# Altium PCB MAX232.PcbDoc
Units mil, origin at the board's own origin, x right, y up, seen from the top; angles counter-clockwise.
Board outline 6000 x 4000 mil, 2 copper layers (Top Layer, Bottom Layer); 7 components, 12 nets, 39 pads, 0 vias.
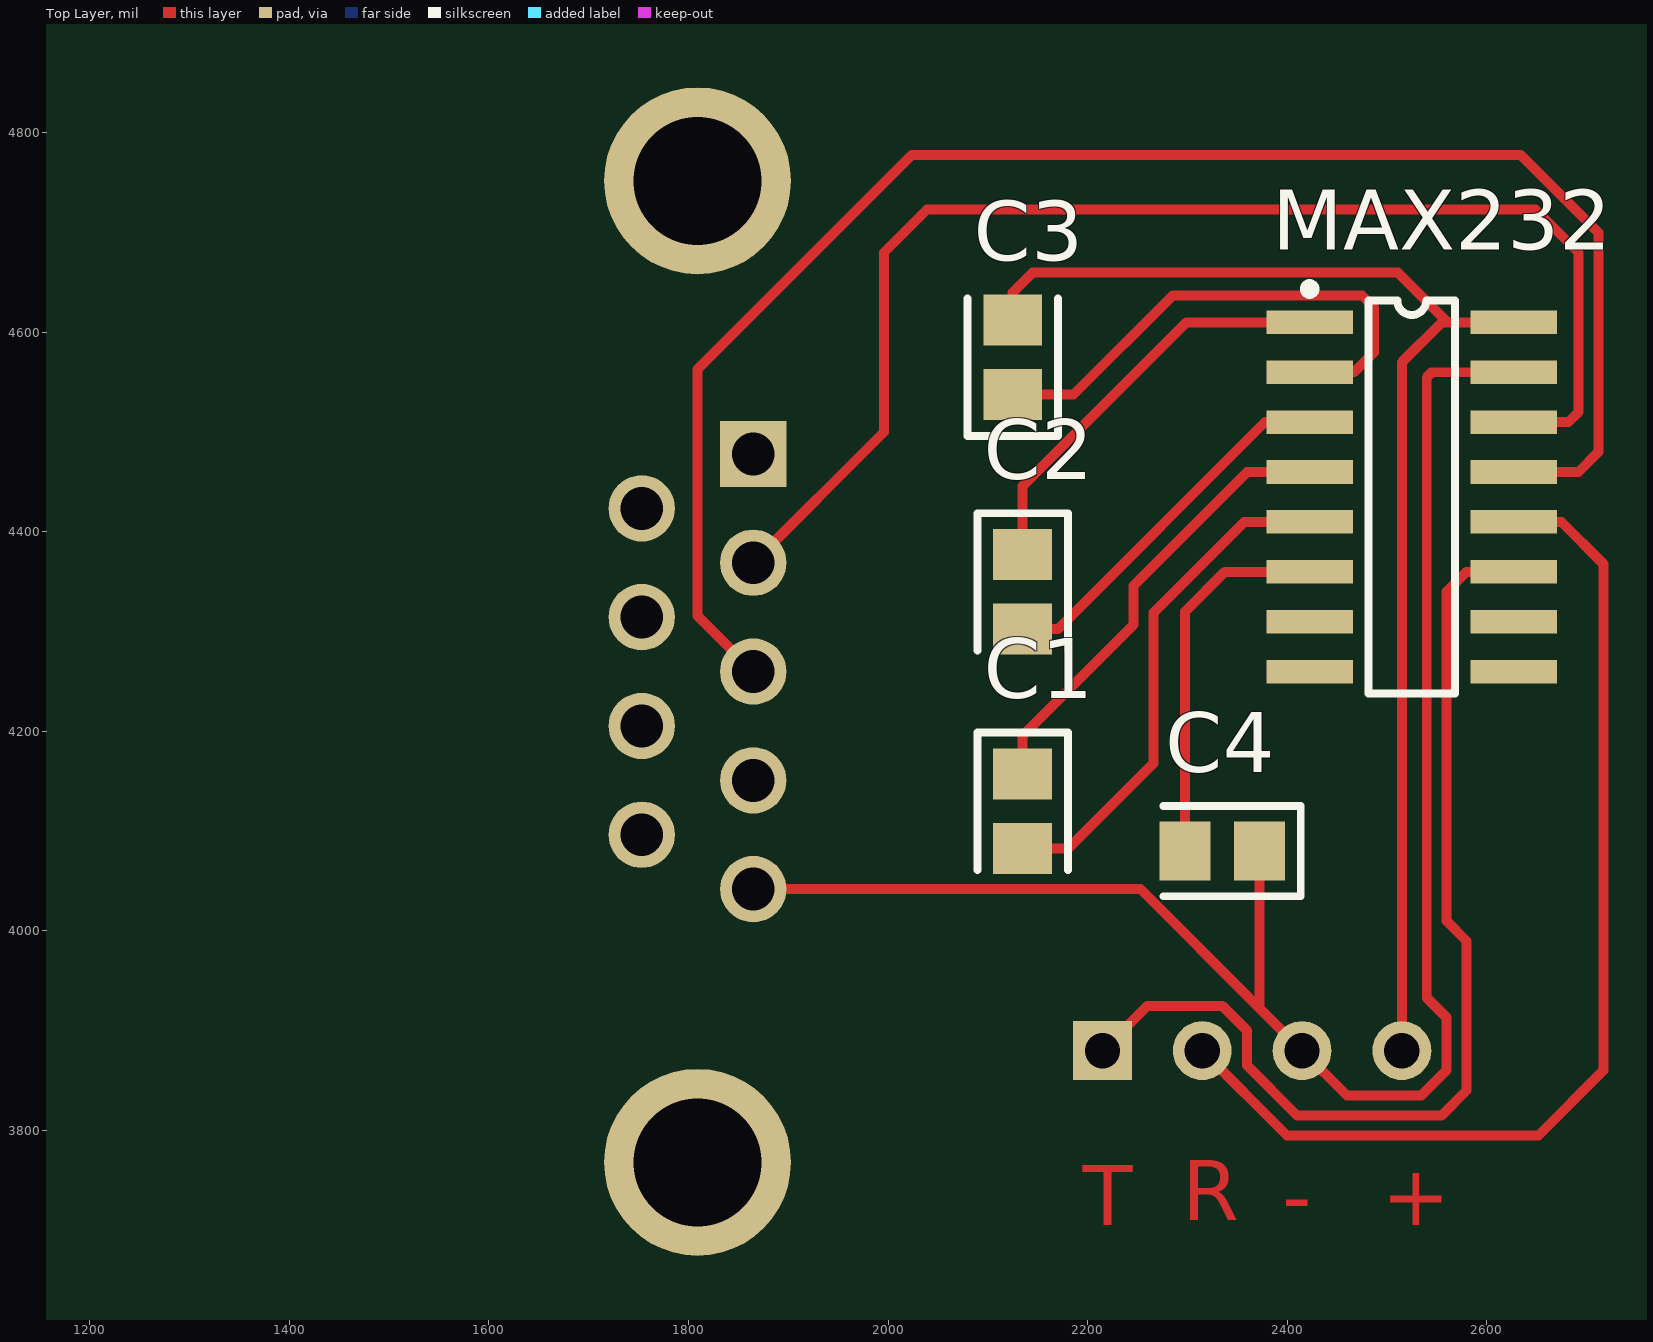
[diagram p0: Top Layer view]
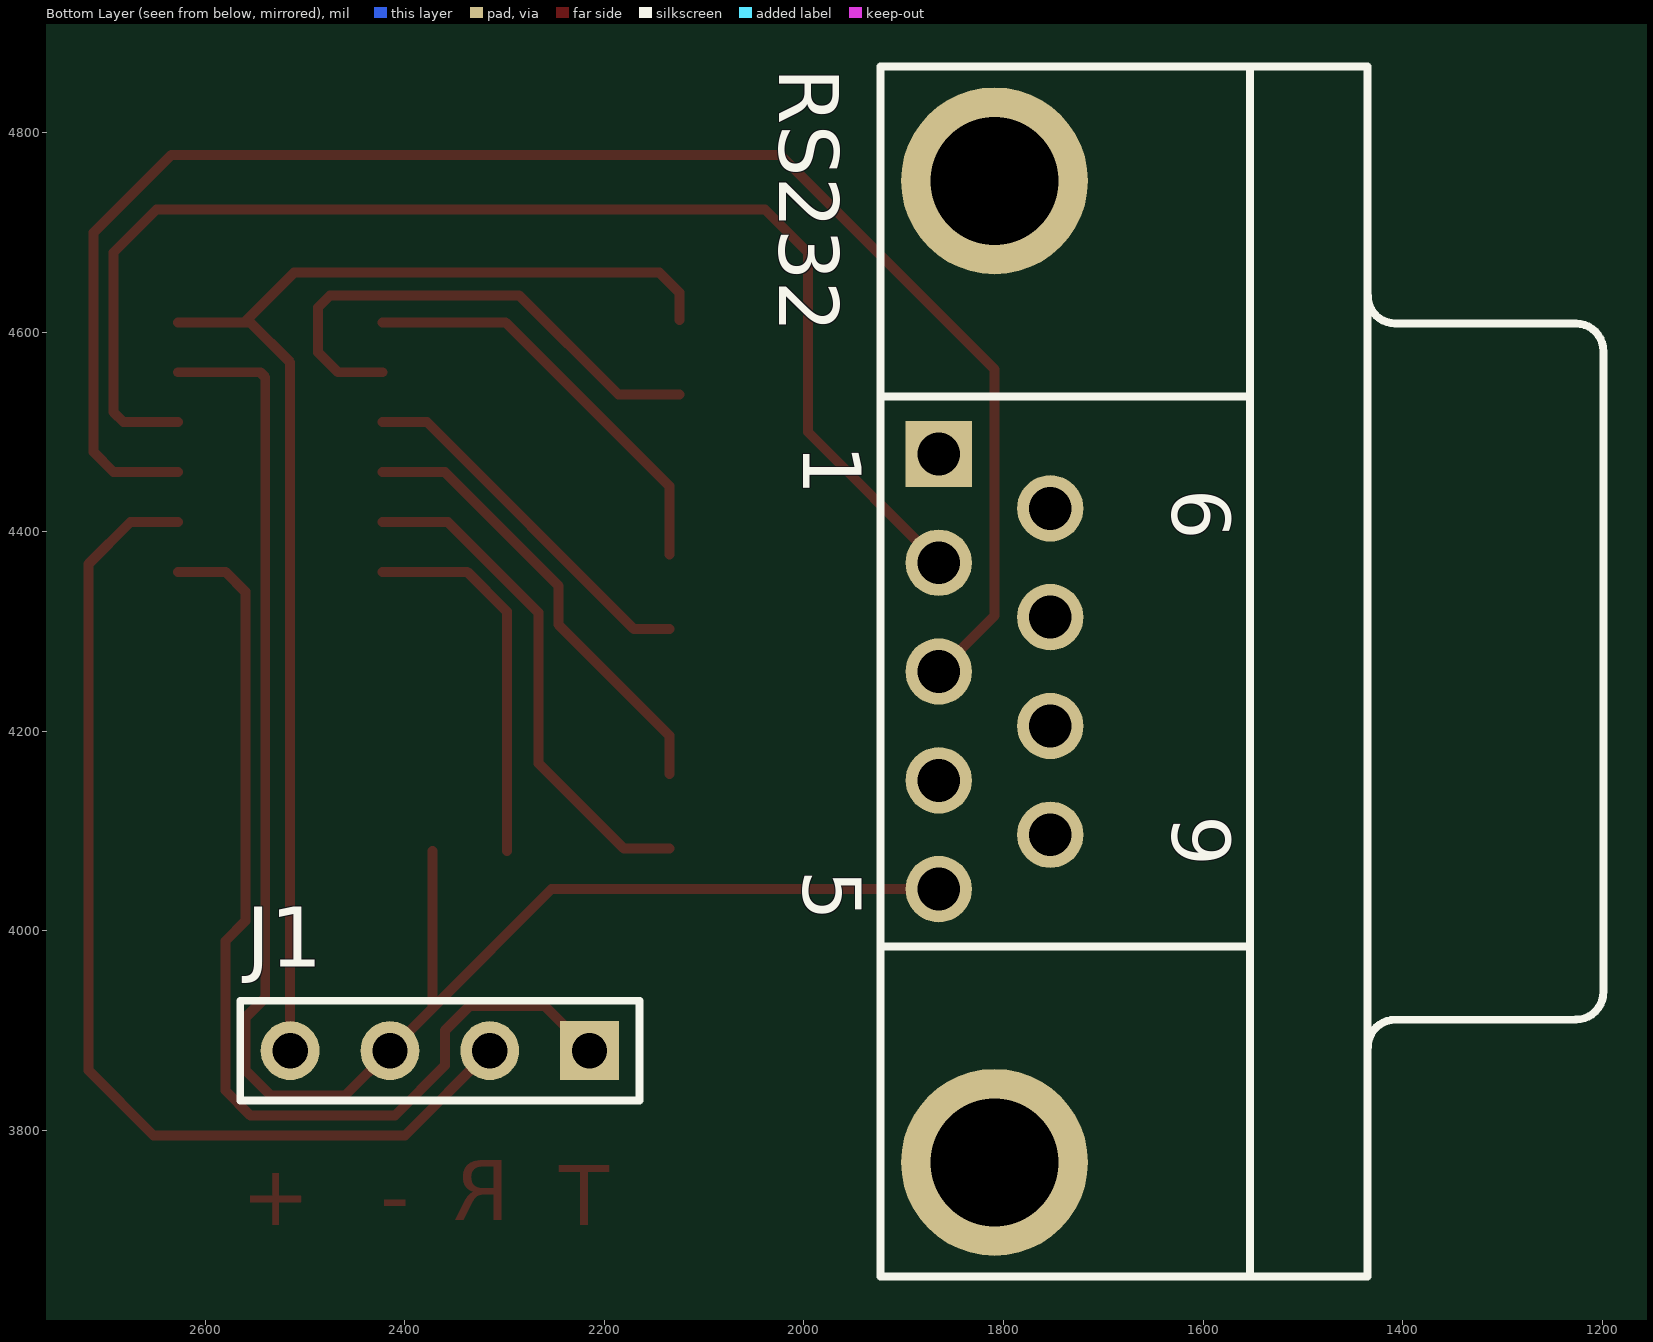
[diagram p1: Bottom Layer view, seen from below]

## Layer stack, top to bottom
Top Layer: signal copper 1.4
Dielectric: dielectric 12.6, FR-4, Dk 4.8
Bottom Layer: signal copper 1.4

## Board outline
1000,1000 7000,1000 7000,5000 1000,5000

## Design rules (kind name [scope] priority, off if disabled: settings)
Clearance [All] p1: gap=10
ComponentClearance [All] p1: gap=10 collisioncheckmode=0
PolygonConnect [All] p1: connectstyle=Relief reliefconductorwidth=10 reliefentries=4 polygonreliefangle="90 Angle"
RoomDefinition MAX232 [InComponentClass('MAX232')] p1: confinementstyle=ConfineIn formatcopy=TRUE outline 1185,3615 2760,3615 2760,4890 1185,4890
RoutingLayers [All] p1: top layer=Horizontal bottom layer=Vertical
RoutingVias [All] p1: holewidth=28 width=50 viastyle="Through Hole" minholewidth=28 minwidth=50 maxholewidth=28 maxwidth=50
SolderMaskExpansion [All] p1: expansion=4
TestPointUsage [All] p1: valid=0 allowmultiple=FALSE
Testpoint [All] p1: side=15 testpointundercomponent=TRUE minsize=40 maxsize=100 preferedsize=60 minholesize=0 maxholesize=40 preferedholesize=32 testpointgrid=1 style=1023 order=-539222988
Width [All] p1: maxlimit=15 minlimit=10 preferedwidth=10 minimp=50.000000 maximp=50.000000 favimp=50.000000
16 further rules are at their usual default settings.

## Components (designator, comment, footprint, x,y, rotation, side; value= is the part's Value field where it differs from the comment)
C1 "Cap Pol3" CC2012-0805 2135,4120 r270 top
C2 "Cap Pol3" CC2012-0805 2135,4340 r270 top
C3 "Cap Pol3" CC2012-0805 2125,4575 r90 top
C4 "Cap Pol3" CC2012-0805 2335,4080 r180 top
J1 "Header 4" HDR1X4 2215,3880 r0 bottom
MAX232 "MAX232CSE" NSO16 2525,4435 r270 top
RS232 "D Connector 9" DSUB1.385-2H9 1435,4260 r270 bottom (schematic designator "RS232 Interface")

## Footprints (in the part's own frame and the unit in brackets; to place one, negate y for a bottom-side part, rotate by r counter-clockwise, add the part's x,y. Pads: shape width x height; smd on the part's side, far side on the other; paste and mask are expansions set on the pad)
CC2012-0805 [mm]
  rect 1.3x1.5 smd: 1(-0.95,0) 2(0.95,0)
  silkscreen extent -2,-1.15 1.5,1.15
DSUB1.385-2H9 [mm] "Connector; D Subminiature; 9 Position; Right Angle; Pitch 1.385 mm"
  rect 1.69x1.69 hole 1.09: 1(-5.54,-10.92)
  round 1.69 hole 1.09: 2(-2.77,-10.92) 3(0,-10.92) 4(2.77,-10.92) 5(5.54,-10.92) 6(-4.155,-8.08) 7(-1.385,-8.08) 8(1.385,-8.08) 9(4.155,-8.08)
  round 4.76 hole 3.26: 10(-12.495,-9.5) 11(12.495,-9.5)
  silkscreen extent -15.4,-12.4 15.4,6
HDR1X4 [mm] "Connector; Header; 4 Position"
  rect 1.5x1.5 hole 0.9: 1(0,0)
  round 1.5 hole 0.9: 2(2.54,0) 3(5.08,0) 4(7.62,0)
  silkscreen extent -1.27,-1.27 8.89,1.27
NSO16 [mm] "Small Outline; 16 Leads; Body Width 3.9 mm; Pitch 1.27 mm"
  rect 0.6x2.2 smd: 1(-4.445,-2.6) 2(-3.175,-2.6) 3(-1.905,-2.6) 4(-0.635,-2.6) 5(0.635,-2.6) 6(1.905,-2.6) 7(3.175,-2.6) 8(4.445,-2.6) 9(4.445,2.6) 10(3.175,2.6) 11(1.905,2.6) 12(0.635,2.6) 13(-0.635,2.6) 14(-1.905,2.6) 15(-3.175,2.6) 16(-4.445,2.6)
  silkscreen extent -5.42,-2.72 5,1.1

## Part data
C1 C2 C3 C4: "Polarized Capacitor (Surface Mount)"
J1: "Header, 4-Pin"
MAX232: "+5V Powered, Multi-Channel RS-232 Driver/Receiver"
RS232: "Receptacle Assembly, 9 Position, Right Angle"

## Nets (pads, with @x,y where several pads share a name; then routed paths per layer and width w, separated by ;. In a path a pad name is that pad's centre, name@x,y a point inside that pad or via, vN(x,y) a via of type N, cw(c..) or ccw(c..) an arc to the next point about the centre after c; other vN are vias at no path point)
GND: C4.1 J1.3 MAX232.15 RS232.5 | length 1741
  Top Layer w10: RS232.5 2253.11,4041.89 2372.4,3922.6 ; C4.1 2372.4,3922.6 ; MAX232.15 2545,4560 2540,4555 2540,3933 2560,3913 2560,3860.47 2534.53,3835 2460,3835 J1.3 2372.4,3922.6
NetC1_1: C1.1 MAX232.4 | length 458.4
  Top Layer w10: C1.1 2135,4196 2246,4307 2246,4346 2360,4460 MAX232.4
NetC1_2: C1.2 MAX232.5 | length 511.7
  Top Layer w10: C1.2 2180.6,4082.6 2266,4168 2266,4319 2357,4410 MAX232.5
NetC2_1: C2.1 MAX232.1 | length 424.2
  Top Layer w10: C2.1 2135,4446 2299,4610 MAX232.1
NetC2_2: C2.2 MAX232.3 | length 373.5
  Top Layer w10: C2.2 2170.6,4302.6 2378,4510 MAX232.3
NetC3_1: C3.1 MAX232.2 | length 525.8
  Top Layer w10: C3.1 2186,4537.6 2285.4,4637 2475,4637 2487,4625 2487,4580 2467,4560 MAX232.2
NetC4_2: C4.2 MAX232.6 | length 381.6
  Top Layer w10: C4.2 2297.6,4320 2337.6,4360 MAX232.6
NetJ1_1: J1.1 MAX232.11 | length 1044
  Top Layer w10: J1.1 2260,3925 2335,3925 2360,3900 2360,3865 2410,3815 2555,3815 2580,3840 2580,3990 2560,4010 2560,4340 2580,4360 MAX232.11
NetJ1_2: J1.2 MAX232.12 | length 1079.2
  Top Layer w10: J1.2 2400,3795 2652,3795 2717,3860 2717,4368 2675,4410 MAX232.12
NetMAX232_13: MAX232.13 RS232.3 | length 1663.5
  Top Layer w10: RS232.3 1809,4315.92 1809,4563 2024,4778 2634,4778 2712,4700 2712,4480 2692,4460 MAX232.13
NetMAX232_14: MAX232.14 RS232.2 | length 1325.6
  Top Layer w10: RS232.2 1996,4500.13 1996,4680 2039,4723 2649,4723 2692,4680 2692,4520 2682,4510 MAX232.14
VCC: C3.2 J1.4 MAX232.16 | length 1311.5
  Top Layer w10: C3.2 2125,4640 2145,4660 2511,4660 2561,4610 ; J1.4 2515,4570 2555,4610 2561,4610 ; MAX232.16 2561,4610
pads on no net: MAX232.7 MAX232.8 MAX232.9 MAX232.10 RS232.1 RS232.4 RS232.6 RS232.7 RS232.8 RS232.9 RS232.10 RS232.11

## Other copper
Top Layer:
  text "R" at 2295,3710 h60
  text "T" at 2195,3705 h60
  text "-" at 2395,3705 h60
  text "+" at 2495,3705 h60

## Text inside footprints (layer, text, board x,y; h text height)
RS232: Bottom Overlay "6" at 1630.87,4443.27 h59.06 r90; Bottom Overlay "9" at 1630.87,4116.1 h59.06 r90; Bottom Overlay "5" at 2000.94,4061.57 h59.06 r90; Bottom Overlay "1" at 2000.94,4487.95 h59.06 r90